# Allegro board iot_node.brd
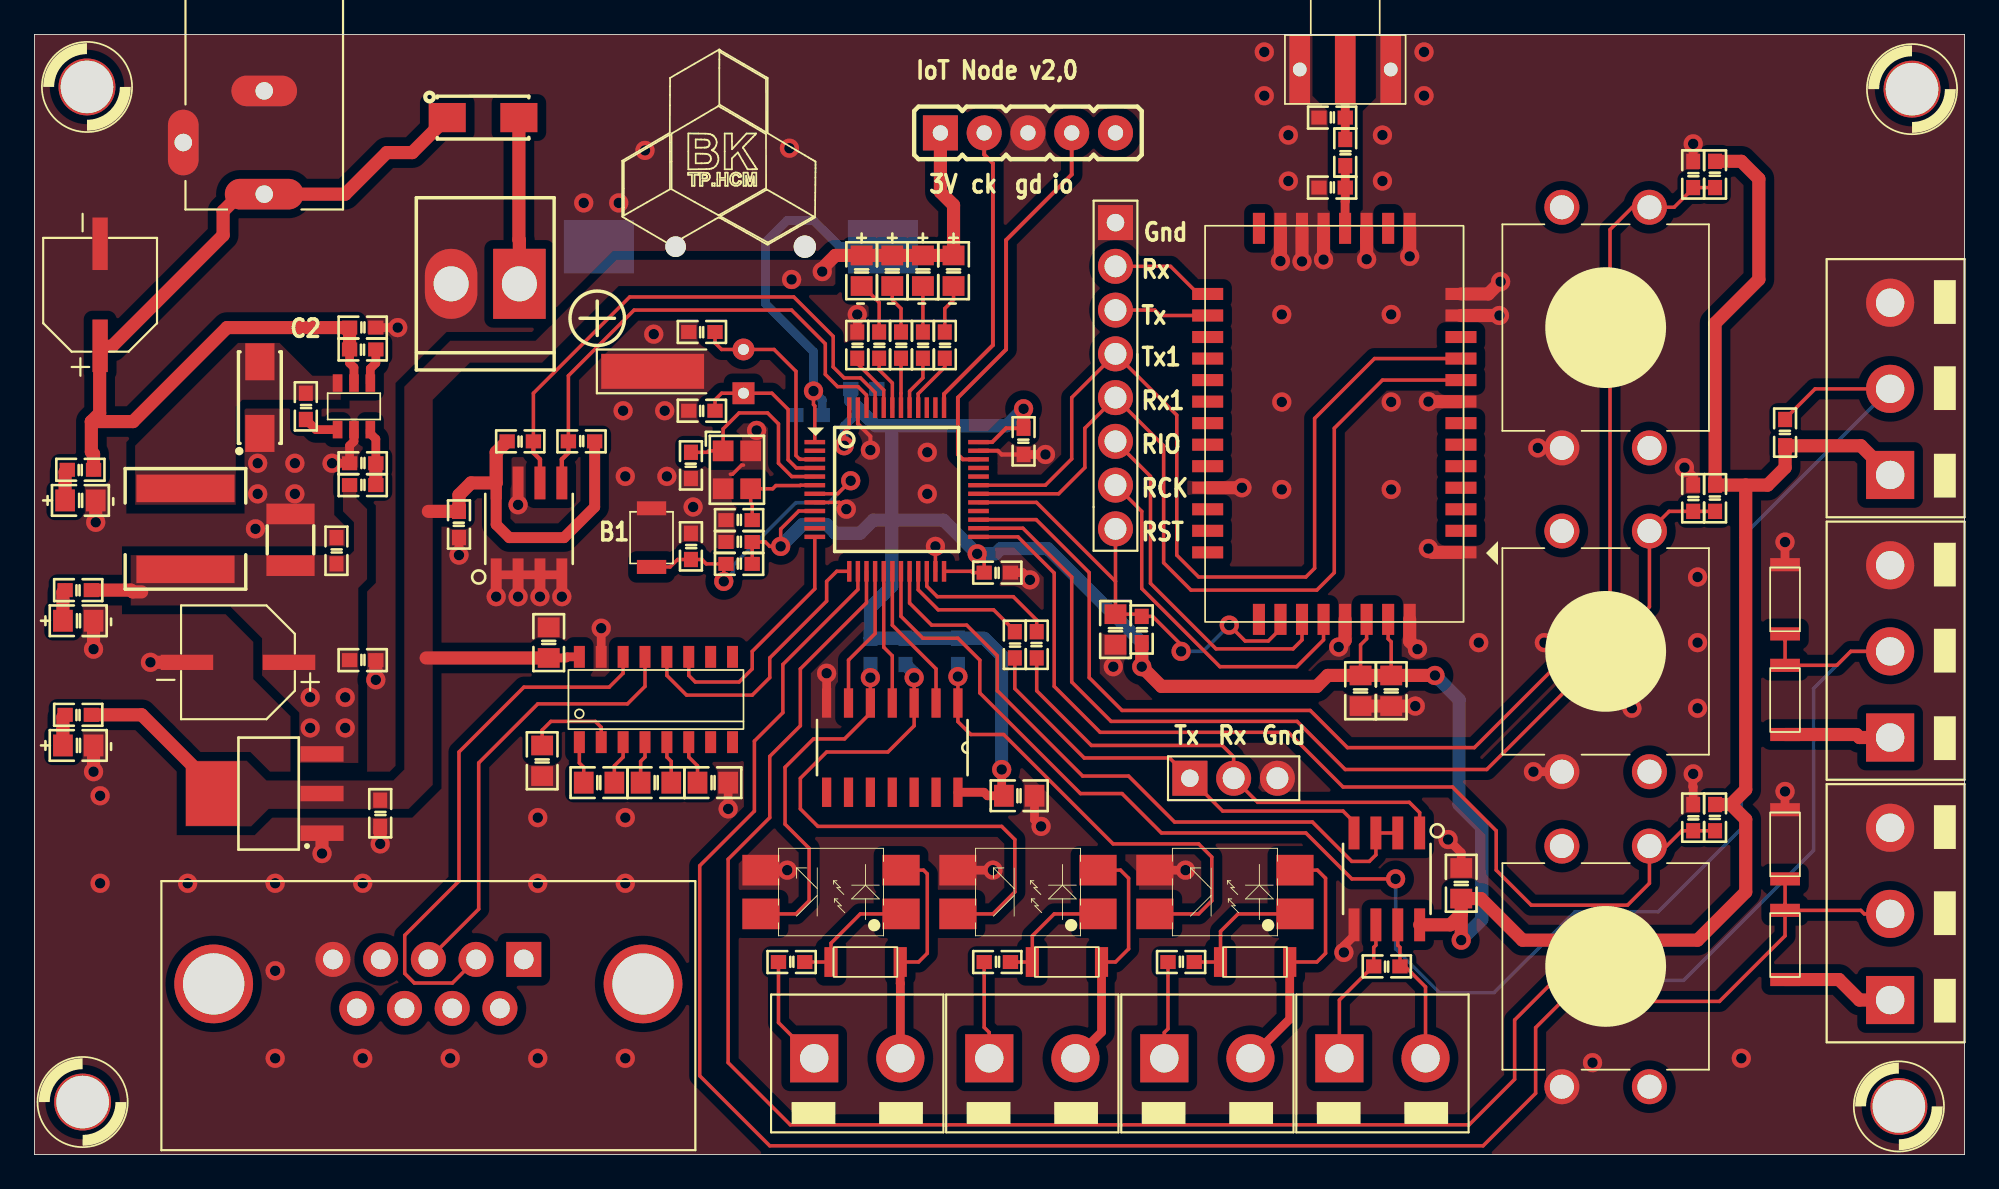
[diagram p0: board, top side]
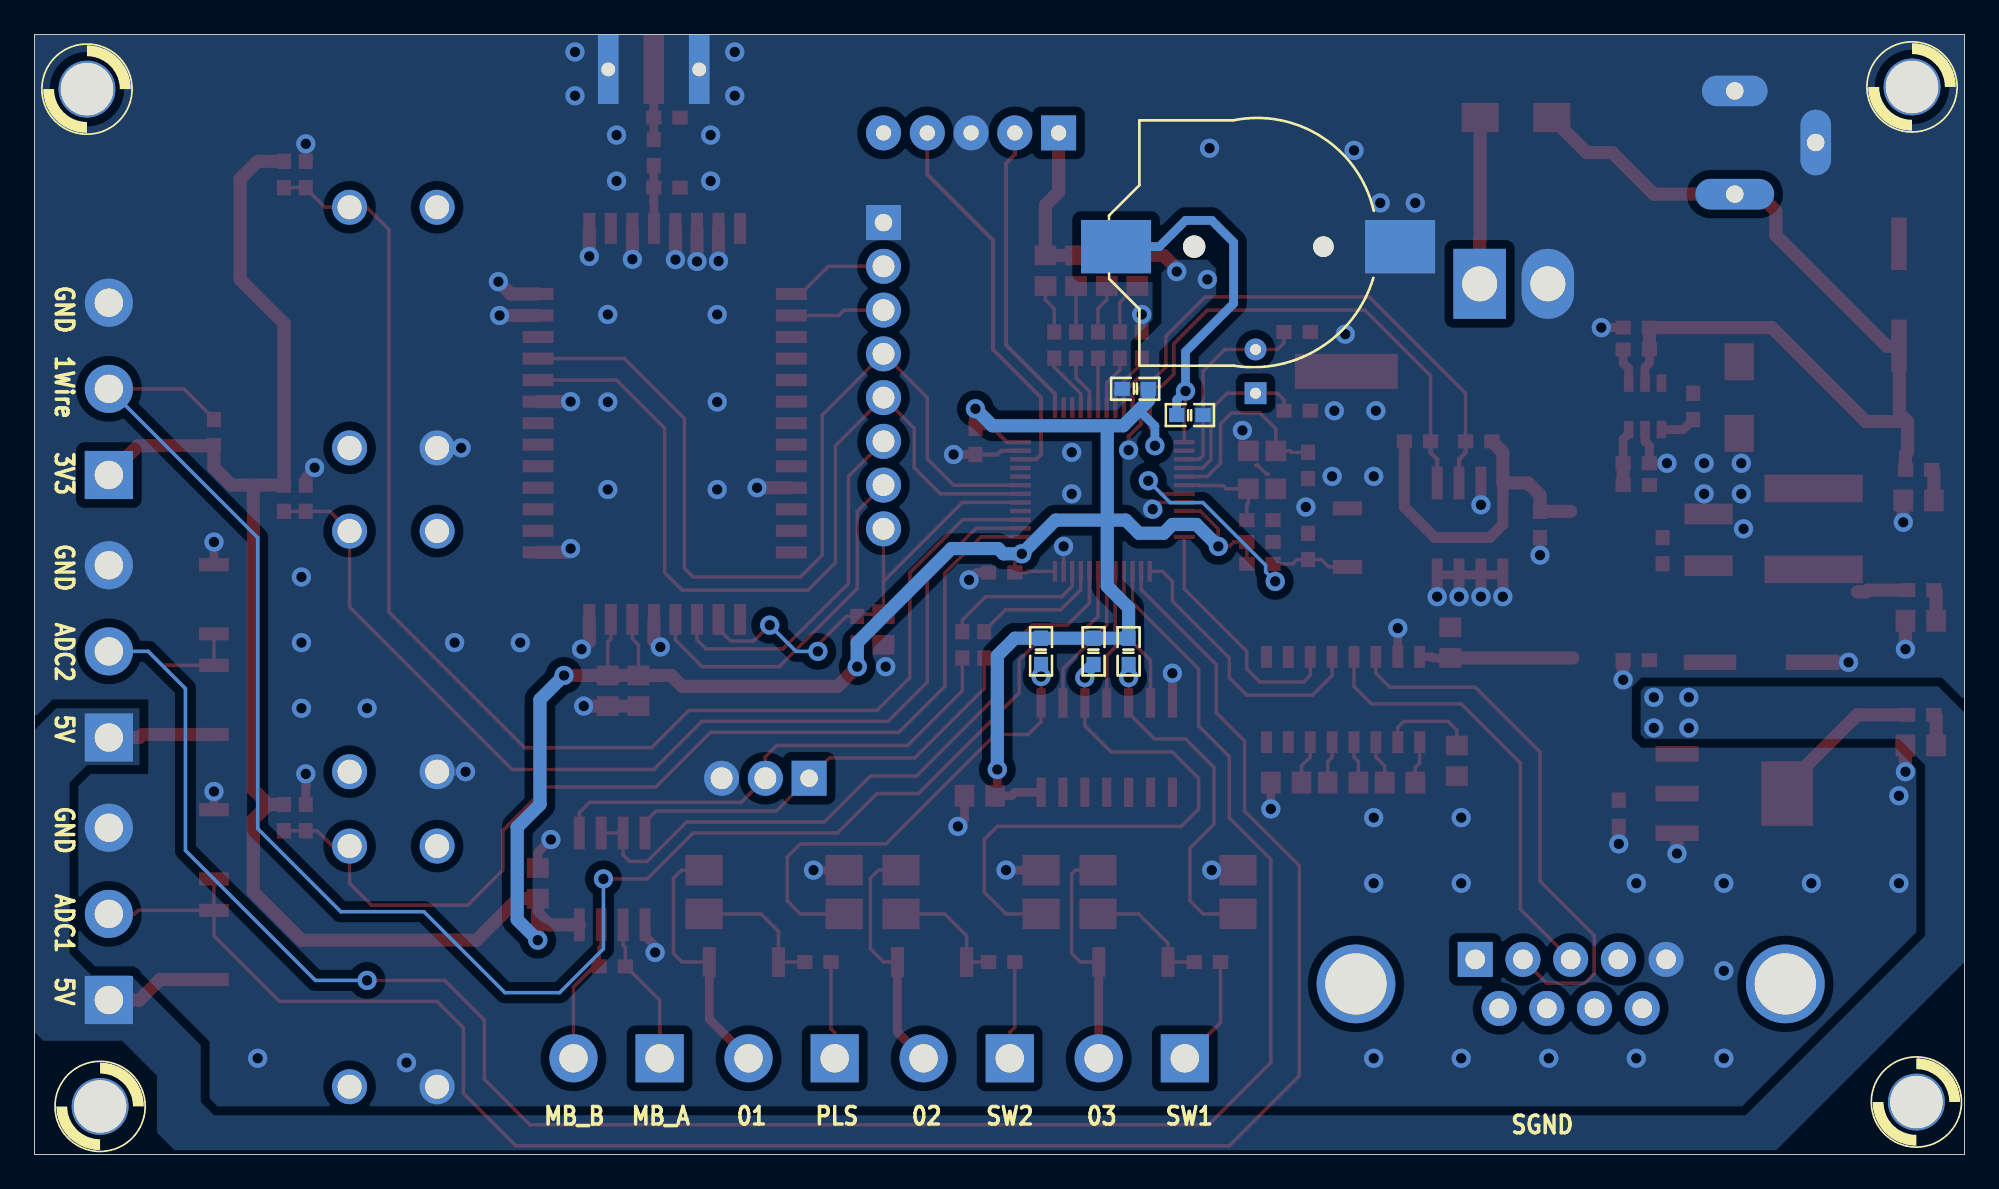
[diagram p1: board, bottom side, seen from below]

Outline 112.01 x 65.02 mm; copper layers: TOP, BOTTOM. Coordinates in mm from the lower left corner of the outline.
Outline path: 0,65.02 0,0 112.01,0 112.01,65.02 0,65.02

## Design rules (mm)
constraint set DEFAULT: min track width 0.203

## Placement (name value [footprint] x y rotation side)
B1  Reset  [B3U-1000P]  35.81 35.81 90 top
C1  10nF  [C0603]  19.05 48.01 180 top
C2  10nF  [C0603]  15.75 43.43 90 top
C3  100uF/35V  [CAP_AL_D]  3.81 49.91 90 top
C4  220u/16V  [CAP_AL_D]  11.81 28.57 180 top
C5  100nF  [C0603]  17.53 35.05 90 top
C6  22u/6.3V  [CAP_1210]  14.86 35.69 90 top
C7  100nF  [C0603]  19.05 28.7 180 top
C8  100nF  [C0603]  20.07 19.81 90 top
C9  0.1uF/6.3V  [C0603]  48.13 44.45 0 bottom
C10  0.1uF  [C0603]  40.89 35.56 180 top
C11  0.1uF/6.3V  [C0603]  44.96 42.93 180 bottom
C12  0.1uF/6.3V  [C0603]  55.88 33.78 0 top
C13  0.1uF/6.3V  [C0603]  57.4 41.4 270 top
C14  18pF  [C0603]  38.1 40 270 top
C15  18pF  [C0603]  40.89 36.83 180 top
C16  0.1uF/6.3V  [C0603]  96.27 19.56 90 top
C17  0.1uF/6.3V  [C0603]  96.27 38.1 90 top
C18  0.1uF/6.3V  [C0603]  38.1 35.31 90 top
C19  0.1uF/6.3V  [C0603]  96.27 56.9 90 top
C20  0.1uF  [C0805]  82.8 15.75 270 top
C22  0.1uF  [C0805]  57.15 20.83 180 top
C23  0.1uF  [C0805]  78.74 26.92 270 top
C24  0.1uF  [C0805]  76.96 26.92 270 top
C25  0.1uF  [C0805]  62.74 30.48 270 top
C26  0.1uF/6.3V  [C0603]  24.64 36.58 270 top
C34  100nF/25V  [C0805]  29.46 22.86 270 top
C35  100nF/25V  [C0805]  39.37 21.59 0 top
C40  10pF  [C0603]  75.31 56.13 180 top
C41  6pF  [C0603]  75.31 60.2 180 top
C148  100nF/25V  [C0805]  32.77 21.59 180 top
C149  100nF/25V  [C0805]  36.07 21.59 0 top
C150  100nF/25V  [C0805]  29.85 29.72 90 top
C151  18pF  [C0603]  38.73 47.75 0 top
C152  18pF  [C0603]  38.73 43.18 0 top
D1  1N4007  [DO214AC_SMA]  26.04 60.2 0 top
D2  1N5819  [DO214AC_SMA]  13.08 43.94 90 top
D3  LED  [LED0805]  2.67 37.97 0 top
D4  LED  [LED0805]  2.54 30.99 0 top
D5  LED  [LED0805]  2.54 23.75 0 top
D6  LED  [LED0805]  53.34 51.31 270 top
D7  LED  [LED0805]  51.56 51.31 270 top
D8  LED  [LED0805]  49.78 51.31 270 top
D9  LED  [LED0805]  48.01 51.31 270 top
D10  1N4007  [SOD80]  101.6 10.16 0 top
D11  1N4007  [SOD80]  101.6 16 0 top
D12  1N4007  [SOD80]  68.83 11.18 270 top
D13  1N4007  [SOD80]  101.6 24.38 0 top
D14  1N4007  [SOD80]  57.91 11.18 270 top
D15  1N4007  [SOD80]  101.6 30.23 0 top
D16  1N4007  [SOD80]  46.23 11.18 270 top
E1  ANTENNA_OPTION1  [SMA_EDGE]  76.07 62.99 90 top
J1  BAT  [HEADER2-PITCH3P96-B2P_VH]  26.16 50.55 180 top
J2  12VDC  [CONN_JACK_DC]  13.34 55.75 90 top
J3  JTAG/STSW  [HEADER_5]  52.58 59.31 0 top
J4  MCU_DBG  [HEADER3PITCH100MIL]  69.6 21.84 0 top
J6  RS485_SLAVE  [DOMINO2_5]  78.23 5.59 0 top
J7  ANALOG_IN1  [DOMINO3_5]  107.7 13.97 90 top
J8  SW_IN1  [DOMINO2_5]  68.07 5.59 0 top
J9  ANALOG_IN2  [DOMINO3_5]  107.7 29.21 90 top
J10  SW_IN2  [DOMINO2_5]  57.91 5.59 0 top
J11  ONEWIRE  [DOMINO3_5]  107.7 44.45 90 top
J12  PULSE_IN  [DOMINO2_5]  47.75 5.59 0 top
J16  DB9PORT  [DB9_FE]  22.86 9.91 180 top
J17  CON8  [HEADER8PITCH100MIL]  62.74 50.29 270 top
L1  8.8uH/1.7A  [IND_6X6MM]  8.76 36.32 270 top
L3  8.2nH  [C0603]  76.07 58.17 90 top
MH1  HOLE 4mm  [MH_3MM_1]  3.05 61.98 0 top
MH2  HOLE 4mm  [MH_3MM_1]  2.79 3.05 0 top
MH3  HOLE 4mm  [MH_3MM_1]  108.2 2.79 0 top
MH4  HOLE 4mm  [MH_3MM_1]  108.97 61.85 0 top
NOREF  -  []  33.78 52.45 0 top
R1  10K  [R0603]  19.05 46.74 0 top
R2  4k7  [R0603]  2.67 39.75 0 top
R3  4k7  [R0603]  2.54 32.77 0 top
R4  4k7  [R0603]  2.54 25.53 0 top
R5  49.9K  [R0603]  19.05 38.86 180 top
R6  10K  [R0603]  19.05 40.13 180 top
R7  4k7  [R0603]  47.75 46.99 90 top
R8  4k7  [R0603]  52.83 46.99 90 top
R9  4k7  [R0603]  51.56 46.99 90 top
R10  4k7  [R0603]  50.29 46.99 90 top
R11  4k7  [R0603]  49.02 46.99 90 top
R12  4.7K  [R0603]  40.89 34.29 180 top
R13  10K  [R0603]  97.54 19.56 270 top
R14  10K  [R0603]  97.54 38.1 270 top
R15  10K  [R0603]  97.54 56.9 270 top
R16  100R  [R0603]  78.49 10.92 0 top
R18  1K  [R0603]  66.55 11.18 180 top
R19  1K  [R0603]  55.88 11.18 180 top
R20  10K  [R0603]  101.6 41.91 270 top
R21  1K  [R0603]  43.94 11.18 180 top
R22  10K  [R0603]  64.26 30.48 90 top
R23  100R  [R0603]  53.59 29.21 270 bottom
R24  100R  [R0603]  50.55 29.21 270 bottom
R25  100R  [R0603]  48.51 29.21 270 bottom
R26  10K  [R0603]  31.75 41.4 180 top
R27  10K  [R0603]  28.19 41.4 0 top
R28  100R  [R0603]  58.17 29.59 270 top
R29  100R  [R0603]  56.9 29.59 90 top
SW1  DETECT SW  [TACT_SWITCH_12X12X7MM_SMD]  91.19 10.92 180 top
SW2  DETECT SW  [TACT_SWITCH_12X12X7MM_SMD]  91.19 29.21 180 top
SW3  DETECT SW  [TACT_SWITCH_12X12X7MM_SMD]  91.19 48.01 180 top
U1  AP3211  [SOT23-6]  18.54 43.43 90 top
U2  LM1117 5V  [SOT-223]  13.59 20.96 0 top
U3  STM32F103C8T6  [LQFP_48]  50.04 38.61 270 top
U5  MAX485  [SOIC-8]  78.49 16 180 top
U6  Opto  [OPTOSMD]  69.09 15.24 90 top
U7  74HC14  [SO_14]  49.78 23.62 270 top
U8  Opto  [OPTOSMD]  57.66 15.24 90 top
U9  Opto  [OPTOSMD]  46.23 15.24 90 top
U10  -  [RAK4600]  75.44 42.42 180 top
U11  AT24C02  [SOIC-8]  28.7 36.32 0 top
U12  MAX3232  [SOIC16]  36.07 26.42 90 top
U13  3V  [BAT_CR1220]  40.89 52.7 90 bottom
Y1  12M-18ppm  [CRY3225_M]  40.77 39.75 90 top
Y4  32.768KHz  [CRYRTC32768]  39.62 45.47 90 top

## Library data of the parts
B1 = SW PUSHBUTTON-SPST-2_0
C1 C2 C7 C8 C20 C22-C25 = CAP NP
C3 C4 = CAP
C5 = Cap 0603
C6 = CAP NP: User Part Number: PartNr
C9-C19 C26 C151 C152 = CAP NP_0
C34 C35 C148-C150 = CAP_USER
C40 = C-10pF/50V-SMD0805
C41 = C-6pF/50V-SMD0805
D1 D10-D16 = DIODE
D2 = SS34_2
D3-D9 = LED_0
E1 = ANTENNA_1
J1 J6 J8 J10 J12 = HEADER 2
J2 = CONN JACK PWR: User Part Number: X; Tolerance: X
J3 = HEADER 5
J4 J7 J9 J11 = HEADER 3
J16 = DB9PORT
J17 = CON8
L1 = INDUCTOR
L3 = L-8.2nH-SMD0805
MH1-MH4 = MOUNTING HOLE
R1 R5 R6 = RES-SM0402_0
R2-R4 R7-R11 R13-R16 R18-R29 = Resistor 0603
R12 = RESISTOR_0
SW1-SW3 = SW PUSHBUTTON-SPST-2
U1 = PMIC_SOT23-6
U2 = RT9193-33GB_1
U3 = STM32F103C8T6
U5 = MAX485_1
U6 U8 U9 = Opto
U7 = 74HC14
U10 = RAK4600
U11 = AT24C02_0
U12 = MAX3232_0: Tolerance: ***; User Part Number: ***
U13 = CR2302_1
Y1 = CRYSTAL-4_0
Y4 = XTAL-RTC

## Footprints (pads in the part's own frame, mm; a bottom-side part is the same pattern mirrored in y, then rotated)
B3U-1000P
  rect 0.813x1.702 smd: 1(-1.702,0) 2(1.702,0)
BAT_CR1220
  round 1.194 hole 1.194 unplated: (0,-3.685)
  round 1.295 hole 1.295 unplated: (0,3.815)
  rect 3.099x4.064 smd: 1(0,8.348) 2(0,-8.134)
C0603
  rect 0.889x0.813 smd: 1(-0.762,0) 2(0.762,0)
C0805
  rect 1.143x1.27 smd: 1(-0.889,0) 2(0.889,0)
CAP_1210
  rect 1.2x2.8 smd: 1(-1.5,0) 2(1.5,0)
CAP_AL_D
  rect 3.048x0.889 smd: 1(-2.962,0) 2(2.962,0)
CONN_JACK_DC
  oval 1.778x4.572 hole 1.016: 1(0,0)
  oval 1.778x3.81 hole 1.016: 2(5.994,0)
  oval 3.81x1.778 hole 1.016: 3(2.997,4.699)
CRY3225_M
  rect 1.2x1.2 smd: 1(1.1,0.8) 2(-1.101,0.8) 3(-1.101,-0.8) 4(1.1,-0.8)
CRYRTC32768
  rect 1.27x1.27 hole 0.635: 1(-1.27,-1.524)
  round 1.27 hole 0.635: 2(1.27,-1.524)
  rect 2.032x5.969 smd: 3(0,3.747)
DB9_FE
  round 4.572 hole 3.556: (-12.459,0) (12.459,0)
  rect 2.032x2.032 hole 1.143: 1(-5.537,-1.422)
  round 2.032 hole 1.143: 2(-2.769,-1.422) 3(0,-1.422) 4(2.769,-1.422) 5(5.537,-1.422) 6(-4.153,1.422) 7(-1.384,1.422) 8(1.384,1.422) 9(4.153,1.422)
DO214AC_SMA
  rect 2.15x1.696 smd: 1(-2.08,0) 2(2.08,0)
DOMINO2_5
  rect 2.794x2.794 hole 1.651: 1(-2.5,0)
  round 2.794 hole 1.651: 2(2.5,0)
DOMINO3_5
  rect 2.794x2.794 hole 1.651: 1(-5,0)
  round 2.794 hole 1.651: 2(0,0) 3(5,0)
HEADER2-PITCH3P96-B2P_VH
  rect 3.048x4.064 hole 2.032: 1(-1.98,0)
  oval 3.048x4.064 hole 2.032: 2(1.98,0)
HEADER3PITCH100MIL
  rect 2.032x2.032 hole 1.016: 1(-2.54,0)
  round 2.032 hole 1.27: 2(0,0) 3(2.54,0)
HEADER8PITCH100MIL
  rect 2.032x2.032 hole 1.016: 1(-3.81,0)
  round 2.032 hole 1.27: 2(-1.27,0) 3(1.27,0) 4(3.81,0) 5(6.35,0) 6(8.89,0) 7(11.43,0) 8(13.97,0)
HEADER_5
  rect 2.032x2.032 hole 0.889: 1(0,0)
  round 2.032 hole 0.889: 2(2.54,0) 3(5.08,0) 4(7.62,0) 5(10.16,0)
IND_6X6MM
  rect 1.6x5.7 smd: 1(-2.35,0) 2(2.35,0)
LED0805
  rect 1.143x1.27 smd: 1(-0.889,0) 2(0.889,0)
LQFP_48
  rect 0.254x1.2 smd: 1(-2.75,-4.75) 2(-2.25,-4.75) 3(-1.75,-4.75) 4(-1.25,-4.75) 5(-0.75,-4.75) 6(-0.25,-4.75) 7(0.25,-4.75) 8(0.75,-4.75) 9(1.25,-4.75) 10(1.75,-4.75) 11(2.25,-4.75) 12(2.75,-4.75) 25(2.75,4.75) 26(2.25,4.75) 27(1.75,4.75) 28(1.25,4.75) 29(0.75,4.75) 30(0.25,4.75) 31(-0.25,4.75) 32(-0.75,4.75) 33(-1.25,4.75) 34(-1.75,4.75) 35(-2.25,4.75) 36(-2.75,4.75)
  rect 1.2x0.254 smd: 13(4.75,-2.75) 14(4.75,-2.25) 15(4.75,-1.75) 16(4.75,-1.25) 17(4.75,-0.75) 18(4.75,-0.25) 19(4.75,0.25) 20(4.75,0.75) 21(4.75,1.25) 22(4.75,1.75) 23(4.75,2.25) 24(4.75,2.75) 37(-4.75,2.75) 38(-4.75,2.25) 39(-4.75,1.75) 40(-4.75,1.25) 41(-4.75,0.75) 42(-4.75,0.25) 43(-4.75,-0.25) 44(-4.75,-0.75) 45(-4.75,-1.25) 46(-4.75,-1.75) 47(-4.75,-2.25) 48(-4.75,-2.75)
MH_3MM_1
  round 3.302 hole 3.048: 1(0,0)
OPTOSMD
  rect 1.778x2.159 smd: 1(-1.27,-4.064) 2(1.27,-4.064) 3(1.27,4.064) 4(-1.27,4.064)
R0603
  rect 0.889x0.813 smd: 1(-0.762,0) 2(0.762,0)
RAK4600
  rect 1.8x0.7 smd: 1(-7.35,7.459) 2(-7.35,6.209) 3(-7.35,4.959) 4(-7.35,3.709) 5(-7.35,2.459) 6(-7.35,1.209) 7(-7.35,-0.041) 8(-7.35,-1.291) 9(-7.35,-2.541) 10(-7.35,-3.791) 11(-7.35,-5.041) 12(-7.35,-6.291) 13(-7.35,-7.541) 22(7.35,-7.541) 23(7.35,-6.291) 24(7.35,-5.041) 25(7.35,-3.791) 26(7.35,-2.541) 27(7.35,-1.291) 28(7.35,-0.041) 29(7.35,1.209) 30(7.35,2.459) 31(7.35,3.709) 32(7.35,4.959) 33(7.35,6.209) 34(7.35,7.459)
  rect 0.7x1.8 smd: 14(-4.375,-11.35) 15(-3.125,-11.35) 16(-1.875,-11.35) 17(-0.625,-11.35) 18(0.625,-11.35) 19(1.875,-11.35) 20(3.125,-11.35) 21(4.375,-11.35) 35(4.375,11.35) 36(3.125,11.35) 37(1.875,11.35) 38(0.625,11.35) 39(-0.625,11.35) 40(-1.875,11.35) 41(-3.125,11.35) 42(-4.375,11.35)
SMA_EDGE
  rect 4x1.2 hole 0.8: 1(0,2.64) 3(0,-2.64)
  rect 4x1.2 smd: 2(0,0)
SO_14
  rect 1.702x0.533 smd: 1(-2.591,3.81) 2(-2.591,2.54) 3(-2.591,1.27) 4(-2.591,0) 5(-2.591,-1.27) 6(-2.591,-2.54) 7(-2.591,-3.81) 8(2.591,-3.81) 9(2.591,-2.54) 10(2.591,-1.27) 11(2.591,0) 12(2.591,1.27) 13(2.591,2.54) 14(2.591,3.81)
SOD80
  rect 1.727x0.762 smd: 1(0,0) 2(-0.004,4.016)
SOIC16
  rect 1.27x0.635 smd: 1(-2.477,4.445) 2(-2.477,3.175) 3(-2.477,1.905) 4(-2.477,0.635) 5(-2.477,-0.635) 6(-2.477,-1.905) 7(-2.477,-3.175) 8(-2.477,-4.445) 9(2.477,-4.445) 10(2.477,-3.175) 11(2.477,-1.905) 12(2.477,-0.635) 13(2.477,0.635) 14(2.477,1.905) 15(2.477,3.175) 16(2.477,4.445)
SOIC-8
  rect 0.635x1.905 smd: 1(-1.905,-2.667) 2(-0.635,-2.667) 3(0.635,-2.667) 4(1.905,-2.667) 5(1.905,2.667) 6(0.635,2.667) 7(-0.635,2.667) 8(-1.905,2.667)
SOT23-6
  rect 1.016x0.559 smd: 1(-1.35,0.95) 2(-1.35,0) 3(-1.35,-0.95) 4(1.35,-0.95) 5(1.35,0) 6(1.35,0.95)
SOT-223
  rect 2.5x0.9 smd: 1(3.1,-2.3) 2(3.1,0) 3(3.1,2.3)
  rect 3x3.75 smd: 4(-3.3,0)
TACT_SWITCH_12X12X7MM_SMD
  round 2.032 hole 1.397: 1(-2.54,-6.985) 2(-2.54,6.985) 3(2.54,-6.985) 4(2.54,6.985)

## Nets
GND: B1.2 C1.1 C3.2 C4.2 C5.2 C6.2 C7.1 C8.1 C9.2 C10.2 C11.2 C12.2 C13.2 C14.2 C15.2 C16.2 C17.2 C18.2 C19.2 C20.1 C22.1 C23.2 C24.2 C25.2 C26.2 C34.2 C35.2 C40.2 C41.2 C150.2 C151.1 C152.1 D2.1 D3.2(CATHODE) D4.2(CATHODE) D5.2(CATHODE) D11.2 D15.2 E1.1 E1.3(GND_2) J1.2 J2.2 J2.3 J3.3 J4.3 J7.3 J9.3 J11.3 J16.5 J17.1 R6.2 R7.2 SW1.4 SW2.4 SW3.4 U1.2 U2.1 U3.8 U3.23 U3.35 U3.47(VSS__2) U5.5 U6.3 U7.7 U8.3 U9.3 U10.1 U10.8 U10.12 U10.13 U10.14 U10.16 U10.18 U10.19 U10.20 U10.31 U10.39 U10.42 U11.1 U11.2 U11.3 U11.4 U11.7(WP) U12.15 U13.2(-) Y1.2 Y1.4 Y4.3
VCC3.3V: C8.2 C9.1 C10.1 C12.1 C13.1 C20.2 C22.2 C23.1 C24.1 C26.1 C150.1 D6.1 D7.1 D8.1 D9.1 J3.1 J11.1 R4.2 R12.1 R13.1 R14.1 R15.1 R20.2 R22.1 R23.1 R24.1 R25.1 R26.1 R27.1 U2.2 U2.4 U3.9 U3.24 U3.36 U3.48 U5.8(VCC) U7.14(VCC) U10.40 U10.41 U11.8 U12.16(VCC)
VCC5V: C4.1 C5.1 C6.1 C7.2 D10.1(K) D13.1(K) J7.1 J9.1 L1.2 R3.2 R5.2 U2.3(VIN)
VIN: C1.2 C3.1 D1.1(K) J2.1 R1.1 R2.2 U1.5
GPIO_BTN_0: C16.1 R13.2 SW1.1 U3.25
GPIO_BTN_1: C17.1 R14.2 SW2.1 U3.26
GPIO_BTN_2: C19.1 R15.2 SW3.1 U3.27
GPIO_LED_0: R8.1 U3.40
GPIO_LED_1: R9.1 U3.41
GPIO_LED_2: R10.1 U3.42
GPIO_LED_3: R11.1 U3.43
I2C1_SCL: U10.5
I2C1_SCL_8130363: R27.2 U3.45 U11.6
I2C1_SDA: U10.4
I2C1_SDA_8130363: R26.2 U3.46 U11.5
JTCK-SWCLK: J3.2 U3.37
JTMS-SWDIO: J3.4 U3.34
LIGHT_SEN_ADC: U3.10
NFC1: U10.6
NFC2: U10.7
NRST: B1.1 C18.1 R12.2 U3.7
OPTO_PULSE: R25.2 U7.5 U9.4
OPTO_SW_1: R23.2 U6.4 U7.1
OPTO_SW_2: R24.2 U7.3 U8.4
P0.17: U10.24
PC14: C151.2 U3.3 Y4.2
PC15: C152.2 U3.4 Y4.1
PULSE_IN: U3.16 U7.6
RAK4600_RST: C25.1 J17.8 R22.2 U3.29 U10.36
RAK4600_RX: J17.5 U3.30 U10.9
RAK4600_TX: J17.4 U3.31 U10.10(USART2_TX)
RF_N: C40.1 L3.1 U10.17
RF_OUT: C41.1 E1.2 L3.2
RS485_A_SLAVE: J6.1 R16.1 U5.6
RS485_B_SLAVE: J6.2 R16.2 U5.7
RS485_DI_MASTER: U3.12 U12.11
RS485_DI_R: J4.1 R29.1 U5.4
RS485_DI_SLAVE: R29.2 U3.21
RS485_DO_R: J4.2 R28.2 U5.1
RS485_RDE_MASTER: U3.11
RS485_RDE_SLAVE: U3.20 U5.2 U5.3
RS485_RO_MASTER: U3.13 U12.12
RS485_RO_SLAVE: R28.1 U3.22
RX2: J16.3(TD) U12.13
SEN_ADC_1: D10.2 D11.1(K) J7.2 U3.14
SEN_ADC_2: D13.2 D15.1(K) J9.2 U3.15
SEN_ONEWIRE: J11.2 R20.1 U3.19
SW_IN_1: U3.18 U7.2
SW_IN_2: U3.17 U7.4
SWCLK: J17.7 U10.38
SWDIO: J17.6 U10.37
TX2: J16.2 U12.14
UART1_RX: J17.2 U10.22
UART1_TX: J17.3 U10.23
N8127918: D1.2 J1.1
N8128142: C2.1 U1.1
N8128146: C2.2 D2.2(CATHODE) L1.1 U1.6(SW)
N8128270: D3.1 R2.1
N8128274: D4.1 R3.1
N8128278: D5.1 R4.1
N8128370: R1.2 U1.4
N8128382: R5.1 R6.1 U1.3
N8130243: C11.1 U3.1 U13.1
N8130573: R7.1 U3.44
N8130891: U3.32
N8130973: C14.1 U3.5 Y1.1
N8131059: C15.1 U3.6 Y1.3(XOUT)
N8138791: J8.1 R18.2
N8138799: D12.1(K) R18.1 U6.1
N8138825: D12.2 J8.2 U6.2
N8139175: J10.1 R19.2
N8139183: D14.1(K) R19.1 U8.1
N8139275: D14.2 J10.2 U8.2
N8139443: J12.1 R21.2
N8139451: D16.1(K) R21.1 U9.1
N8139477: D16.2 J12.2 U9.2
N8145499: C148.1 U12.3
N8145507: C148.2 U12.1
N8145545: C149.1 U12.4
N8145573: C149.2 U12.5
N8145585: C34.1 U12.2
N8145597: C35.1 U12.6
N81312031: D6.2(CATHODE) R8.2
N81312191: D7.2(CATHODE) R9.2
N81312351: D8.2(CATHODE) R10.2
N81312511: D9.2(CATHODE) R11.2

Pads without a net: J3 5; J16 1 4 6 7 8 9; MH1 1; MH2 1; MH3 1; MH4 1; SW1 2 3; SW2 2 3; SW3 2 3; U3 2 28 33 38 39; U7 8 9 10 11 12 13; U10 2 3 11 15 21 25 26 27 28 29 30 32 33 34 35; U12 7 8 9 10

## Via types
v1: diameter 1.118, hole 0.61, TOP to BOTTOM, 130 vias

## Routing (per net, layer and track width the routed paths; a pad name or vN(x,y) marks a point on that pad's centre or on a via; arc(x,y) is an arc through that point)
GND: length 91
  TOP w0.203: 41.15,40.02 41.04,40.02 40.51,39.5 40.39,39.5 ; U3.23 v1(52.29,35.31) ; U3.8 46.7,37.86 46.71,37.85 46.74,37.85 v1(47.12,37.46)
  TOP w0.229: v1(48.51,40.89) 48.51,41.69 47.79,42.42 U3.47 ; U3.35 55.92,40.86 56.13,40.64
  TOP w0.254: 56.13,40.64 C13.2
  TOP w0.508: U1.2 18.54,41.4 18.29,41.15 R6.2 v1(17.27,40.13) ; C17.2 96.27,39.37 v1(95.76,39.88) ; C1.1 v1(21.08,48.01) ; U9.3 v1(43.69,16.51) ; C26.2 v1(24.64,34.8) ; C12.2 57.35,33.78 v1(57.77,33.36) ; 29.34,33.65 v1(29.34,32.38) ; 29.34,33.65 U11.2 ; 29.34,33.65 U11.4 v1(30.61,32.38) ; U11.2 v1(28.07,32.38) ; U11.2 U11.1 v1(26.8,32.38) ; U8.3 v1(55.63,16.51) ; C16.2 96.27,21.34 96.24,21.36 96.24,22.08 v1(96.27,22.1) ; SW2.4 v1(87,22.23) ; C19.2 v1(96.27,58.67) ; C20.1 82.8,17.53 v1(82.04,18.29) ; C13.2 v1(58.67,40.64) ; SW3.4 v1(87.25,41.02) ; v1(75.99,11.73) 75.99,12.11 76.58,12.7 U5.5 ; D11.2 v1(101.6,21.08) ; U11.7 v1(28.07,37.72) ; R7.2 v1(47.75,48.77) ; C35.2 v1(40.26,20.07) ; C22.1 58.04,19.43 v1(58.42,19.05) ; U12.15 v1(32.89,30.56) ; U6.3 v1(66.8,16.51) ; U7.7 v1(45.97,27.94) ; D15.2 v1(101.6,35.56)
  TOP w0.762: U10.42 79.81,29.79 v1(80.26,29.34) ; v1(75.69,29.46) 76.06,29.84 U10.39 ; C24.2 C23.2 v1(80.14,26.04) ; U10.16 v1(77.31,51.97) ; U10.14 v1(79.81,52.14) ; C8.1 v1(20.07,18.03) ; U10.18 v1(74.81,51.95) ; 3.43,23.75 v1(3.43,22.23) ; v1(80.9,35.18) 81.12,34.96 U10.1 ; C7.1 v1(19.81,27.56) ; v1(85.09,50.67) 84.38,49.96 U10.13 ; U10.12 v1(85.02,48.71) ; U10.8 v1(80.9,43.71) ; D3.2 v1(3.56,36.7) ; 3.43,30.99 v1(3.43,29.34) ; U10.19 v1(73.56,51.85) ; C4.2 v1(6.73,28.57) ; U10.31 v1(70.08,38.71) ; U10.20 v1(72.31,51.87) ; U2.1 v1(16.69,17.47)
  vias: v1(3.81,20.83) v1(3.81,15.75) v1(8.89,15.75) v1(12.83,36.32) v1(12.95,40.13) v1(12.95,38.35) v1(13.97,15.75) v1(13.97,10.67) v1(13.97,5.59) v1(15.11,40.13) v1(15.11,38.35) v1(19.05,15.75) v1(19.05,5.59) v1(24.13,5.59) v1(29.21,19.56) v1(29.21,15.75) v1(29.21,5.59) v1(31.88,55.24) v1(33.91,55.24) v1(34.16,43.18) v1(34.29,39.37) v1(34.29,19.56) v1(34.29,15.75) v1(34.29,5.59) v1(35.43,58.29) v1(35.94,47.62) v1(36.58,43.18) v1(36.7,39.37) v1(38.23,37.59) v1(41.91,42.04) v1(43.81,58.42) v1(51.82,40.77) v1(51.82,38.35) v1(62.61,28.32) v1(71.37,64.01) v1(71.37,61.47) v1(72.39,48.77) v1(72.39,43.69) v1(72.39,38.61) v1(72.77,59.18) v1(72.77,56.52) v1(78.23,59.18) v1(78.23,56.52) v1(78.74,48.77) v1(78.74,43.69) v1(78.74,38.61) v1(80.65,64.01) v1(80.65,61.47) v1(83.82,29.72) v1(87.63,29.72) v1(90.42,5.33) v1(92.71,25.91) v1(96.52,33.53) v1(96.52,29.72) v1(96.52,25.91) v1(99.06,5.59)
VCC3.3V: length 269.9
  TOP w0.203: R12.1 C10.1 42.42,35.56 42.67,35.31 v1(43.31,35.31) 43.31,36.31 44.36,37.36 U3.9 ; C24.1 76.96,29.59 77.31,29.94 U10.40 ; U10.41 78.56,29.94 78.74,29.76 C23.1 ; v1(54.71,34.87) 54.91,34.87 55.12,34.67 C12.1 54.44,33.78 54.37,33.86 U3.24 ; U3.48 47.29,42.21 47.26,42.18 47.23,42.18 46.99,41.94 v1(46.99,41.15)
  TOP w0.229: C13.1 56.39,42.16 55.58,41.36 U3.36
  TOP w0.508: U12.16 30.92,28.89 30.86,28.83 C150.1 ; U7.14 55.11,21.03 55.31,20.83 C22.2 56.13,20.96 v1(56.13,22.35)
  TOP w0.635: R26.1 32.51,37.59 30.73,35.81 27.56,35.81 26.8,36.58 U11.8
  TOP w0.762: v1(45.72,51.26) 45.72,51.43 46.48,52.2 53.34,52.2 53.34,55.12 52.58,55.88 J3.1 ; U5.8 82.17,13.34 82.8,13.97 ; 98.45,20.32 99.31,21.18 99.31,38.86 ; 98.45,20.32 R13.1 ; 98.45,20.32 99.31,19.46 99.31,15.24 96.52,12.45 86.36,12.45 83.95,14.86 C20.2 82.8,13.97 ; R15.1 99.06,57.66 100.08,56.64 100.08,50.8 97.54,48.26 R14.1 99.31,38.86 ; 82.8,13.97 v1(82.8,12.45) ; 99.31,38.86 100.58,38.86 101.6,39.88 R20.2 106,41.15 J11.1 ; C150.1 22.73,28.83 ; U2.4 10.29,21.46 6.22,25.53 R4.2 ; C13.1 v1(57.4,43.29) ; 22.86,37.34 C26.1 24.64,38.29 25.34,38.99 U11.8 26.8,40.77 R27.1 ; v1(81.28,27.81) C23.1 C24.1 75.06,27.81 74.42,27.18 65.41,27.18 v1(64.26,28.32) R22.1
  BOTTOM w0.508: v1(46.99,41.15) 46.99,42.29 47.92,43.22
  BOTTOM w0.762: v1(64.26,28.32) R22.1 58.8,35.18 56.08,35.18 55.78,34.87 v1(54.71,34.87) 52.76,36.83 49.75,36.83 ; v1(43.31,35.31) 44.58,36.58 45.97,36.58 46.48,36.07 47.92,36.07 48.68,36.83 49.75,36.83 ; v1(57.4,43.29) 56.42,42.31 49.75,42.31 ; 49.75,36.83 49.75,42.31 ; 49.75,36.83 49.75,32.99 48.51,31.75 R25.1 R24.1 R23.1 55.12,29.97 56.13,28.96 v1(56.13,22.35) ; 49.75,42.31 48.83,42.31 47.37,43.76 C9.1 ; v1(81.28,27.81) 82.68,26.42 82.68,20.32 84,19 84,13.64 v1(82.8,12.45)
  vias: v1(43.94,50.8)
VCC5V: length 15.7
  TOP w0.762: 6.22,32.66 5.7,32.66 5.6,32.77 R3.2 ; J7.1 105.92,8.97 104.73,10.16 D10.1 ; J9.1 105.92,24.21 105.74,24.38 D13.1
  vias: v1(16,26.54) v1(16,24.77) v1(18.03,26.54) v1(18.03,24.77)
VIN: length 54.5
  TOP w0.508: U1.5 18.54,45.69 18.29,45.95 R1.1
  TOP w0.762: 3.3,42.55 3.3,40.79 3.43,40.67 R2.2 ; 3.3,42.55 5.72,42.55 11.18,48.01 C1.2 R1.1 ; 3.3,42.55 3.78,43.03 3.78,46.92 ; C3.1 3.78,46.92 ; 3.78,46.92 4.5,46.92 10.95,53.37 10.95,54.76 11.94,55.75 J2.1 18.03,55.75 20.45,58.17 21.92,58.17 D1.1
GPIO_BTN_0: length 59.9
  TOP w0.203: R13.2 C16.1 95.61,18.8 94.72,17.91 SW1.1 93.73,15.75 92.46,14.48 86.87,14.48 84.84,16.51 84.84,18.8 82.3,21.34 75.95,21.34 72.77,24.51 61.85,24.51 59.18,27.18 59.18,33.76 57.08,35.86 U3.25
GPIO_BTN_1: length 60.9
  TOP w0.203: R14.2 C17.1 94.87,37.34 SW2.1 93.73,31.79 84.28,22.35 76.07,22.35 73.28,25.15 62.48,25.15 60.2,27.43 60.2,33.53 57.37,36.36 U3.26
GPIO_BTN_2: length 78.3
  TOP w0.203: R15.2 C19.1 96.27,56.1 95.16,54.99 SW3.1 92.74,54.99 91.44,53.7 91.44,31.5 83.57,23.62 76.2,23.62 74.04,25.78 63.12,25.78 61.21,27.69 61.21,33.78 58.14,36.86 U3.27
GPIO_LED_0: length 3.5
  TOP w0.203: U3.40 51.29,44.17 52.83,45.71 R8.1
GPIO_LED_1: length 3.2
  TOP w0.203: U3.41 50.79,44.31 51.56,45.09 R9.1
GPIO_LED_2: length 2.9
  TOP w0.203: U3.42 50.29,44.19 50.29,44.19 R10.1
GPIO_LED_3: length 3.2
  TOP w0.203: U3.43 49.79,44.79 49.02,45.55 R11.1
I2C1_SCL_8130363: length 31.7
  TOP w0.203: R27.2 28.96,44.2 34.54,49.78 44.07,49.78 46.35,47.5 46.35,45.72 46.99,45.09 47.94,45.09 48.79,44.23 U3.45
  TOP w0.254: 29.34,38.99 29.34,40.36 28.96,40.74 R27.2
I2C1_SDA_8130363: length 29.1
  TOP w0.203: R26.2 30.99,45.21 34.8,49.02 43.94,49.02 45.9,47.07 45.9,45.29 46.61,44.58 47.8,44.58 48.29,44.09 U3.46
  TOP w0.254: R26.2 30.99,40.74 30.61,40.36 U11.5
JTCK-SWCLK: length 17.3
  TOP w0.229: U3.37 52.79,44.15 55.63,46.99 55.63,57.54 55.12,58.05 J3.2
JTMS-SWDIO: length 22.7
  TOP w0.229: J3.4 60.2,56.9 56.39,53.09 56.39,46.74 53.59,43.94 53.59,40.64 53.88,40.36 U3.34
NRST: length 18.1
  TOP w0.203: B1.1 36.89,34.11 37.33,34.54 C18.1 38.73,34.54 38.99,34.29 R12.2 40,34.16 v1(40,33.27) ; U3.7 46.61,38.36 v1(47.37,39.12)
  BOTTOM w0.203: v1(40,33.27) 40.56,33.83 40.56,34.21 44.2,37.85 46.1,37.85 v1(47.37,39.12)
OPTO_PULSE: length 20.5
  TOP w0.203: U9.4 44.2,13.97 44.96,14.73 44.96,17.78 43.56,19.18 43.56,22.48 45.21,24.13 47.02,24.13 48.51,25.63 U7.5 v1(48.51,27.69)
  BOTTOM w0.762: v1(48.51,27.69) R25.2
OPTO_SW_1: length 27.5
  TOP w0.203: U6.4 67.56,13.97 68.33,14.73 68.33,17.27 67.56,18.03 62.6,18.03 56.25,24.38 54.34,24.38 53.59,25.13 U7.1 v1(53.59,27.75)
  BOTTOM w0.762: v1(53.59,27.75) R23.2
OPTO_SW_2: length 33.5
  TOP w0.203: v1(51.05,27.69) U7.3 51.05,24.89 49.53,23.37 45.97,23.37 44.45,21.84 44.45,20.07 45.47,19.05 56.13,19.05 56.9,18.29 56.9,15.24 55.63,13.97 U8.4
  BOTTOM w0.762: v1(51.05,27.69) 51.05,27.94 R24.2
PC14: length 12.1
  TOP w0.203: C151.2 39.5,47.12 39.88,46.74 Y4.2 42.93,46.74 44.2,45.47 44.2,40.58 44.4,40.38 44.44,40.38 44.46,40.36 U3.3
PC15: length 10.1
  TOP w0.203: U3.4 44.22,39.86 43.74,40.34 43.74,43.26 42.8,44.2 Y4.1 39.88,44.2 39.5,43.81 C152.2
PULSE_IN: length 8.3
  TOP w0.203: U3.16 48.79,30.25 47.24,28.7 U7.6
RAK4600_RST: length 27.3
  TOP w0.203: 62.74,33.27 58.15,37.86 U3.29 ; 62.74,33.27 C25.1 64.14,31.37 R22.2 64.9,31.24 66.55,29.59 v1(66.55,29.21) ; 62.74,33.27 J17.8 ; U10.36 72.31,30.52 71.61,29.81 70.26,29.81 v1(69.34,30.73)
  BOTTOM w0.203: v1(66.55,29.21) 67.82,29.21 v1(69.34,30.73)
RAK4600_RX: length 50.2
  TOP w0.203: U3.30 59.44,38.36 60.96,39.88 60.96,42.16 J17.5 65.53,41.15 65.53,34.35 67.12,32.77 74.42,32.77 75.44,33.78 75.44,42.16 78.23,44.96 U10.9
RAK4600_TX: length 53.7
  TOP w0.203: U10.10 77.77,46.21 74.3,42.73 74.3,34.04 73.79,33.53 67.56,33.53 66.29,34.8 66.29,42.93 J17.4 60.2,43.94 60.2,40.39 58.67,38.86 U3.31
RF_N: length 3.6
  TOP w0.508: L3.1 C40.1 76.07,55.35 76.06,55.34 U10.17
RF_OUT: length 4.1
  TOP w0.508: E1.2 C41.1 L3.2
RS485_A_SLAVE: length 8.6
  TOP w0.203: U5.6 77.85,12.15 77.72,12.03 R16.1 77.69,10.92 75.73,8.97 J6.1
RS485_B_SLAVE: length 8.6
  TOP w0.203: J6.2 80.73,9.73 79.54,10.92 R16.2 79.25,12.03 79.12,12.15 U5.7
RS485_DI_MASTER: length 14.4
  TOP w0.203: U3.12 45.29,32.84 41.66,29.21 41.66,28.19 40.89,27.43 38.35,27.43 37.97,27.81 U12.11
RS485_DI_R: length 25.3
  TOP w0.203: R29.1 56.9,27.05 60.93,23.02 65.88,23.02 J4.1 68.96,19.94 75.95,19.94 76.58,19.3 U5.4
RS485_DI_SLAVE: length 7.7
  TOP w0.203: R29.2 56.9,30.39 55.66,31.62 52.45,31.62 51.29,32.79 U3.21
RS485_DO_R: length 29
  TOP w0.203: R28.2 58.17,26.92 61.34,23.75 68.94,23.75 69.6,23.09 J4.2 70.99,20.45 79.79,20.45 80.39,19.85 U5.1
RS485_RDE_SLAVE: length 39
  TOP w0.203: U3.20 50.79,32.02 52.07,30.73 54.1,30.73 55.88,28.96 55.88,26.92 60.83,21.97 63.5,21.97 66.17,19.3 74.17,19.3 76.45,17.02 77.47,17.02 77.85,17.4 U5.3 U5.2
RS485_RO_MASTER: length 16.5
  TOP w0.203: U3.13 46.56,33.86 45.97,33.27 45.97,32.13 42.67,28.83 42.67,27.69 41.66,26.67 37.85,26.67 36.7,27.81 U12.12
RS485_RO_SLAVE: length 8.7
  TOP w0.203: R28.1 58.17,31.03 56.81,32.38 52.4,32.38 51.79,32.99 U3.22
RX2: length 25.8
  TOP w0.203: U12.13 35.43,27.18 34.42,26.16 29.21,26.16 25.78,22.73 25.78,14.25 J16.3
SEN_ADC_1: length 114.5
  TOP w0.203: D10.2 101.6,12.7 97.79,8.89 88.65,8.89 87.12,7.37 87.12,3.56 84.07,0.51 42.67,0.51 38.61,4.57 38.61,16.76 41.78,19.94 41.78,24 43.43,25.65 43.43,28.45 47.79,32.8 U3.14 ; D10.2 101.6,14.56 101.6,14.56 D11.1 ; D10.2 105.99,14.18 106.2,13.97 J7.2
SEN_ADC_2: length 127.9
  TOP w0.203: v1(92.71,10.11) 88.2,10.11 85.9,7.81 85.9,4.37 83.26,1.73 43.87,1.73 40.26,5.33 40.26,17.14 42.67,19.56 42.67,23.11 44.45,24.89 44.45,28.19 48.29,32.03 U3.15 ; 101.6,28.4 104.6,28.4 105.41,29.21 J9.2 ; 101.6,28.4 101.6,29.84 101.6,29.85 D15.1 ; 101.6,28.4 D13.2
  BOTTOM w0.203: J9.2 105.41,29.21 103.25,27.05 103.25,17.65 95.71,10.11 v1(92.71,10.11)
SEN_ONEWIRE: length 103.8
  TOP w0.203: J11.2 103.34,44.45 101.6,42.71 R20.1 ; v1(78.99,16) 76.45,16 73.79,18.67 65.41,18.67 63.12,20.96 60.71,20.96 54.86,26.8 54.86,28.7 53.59,29.97 51.56,29.97 50.29,31.25 U3.19
  BOTTOM w0.203: v1(78.99,16) 78.99,11.94 81.53,9.4 84.71,9.4 89.41,14.1 94.23,14.1 99.06,18.92 99.06,35.81 J11.2
SW_IN_1: length 8.7
  TOP w0.203: U7.2 52.32,28.19 49.79,30.73 U3.18
SW_IN_2: length 7.9
  TOP w0.203: U3.17 49.29,29.45 49.78,28.96 U7.4
SWCLK: length 20.9
  TOP w0.203: J17.7 64.26,37.34 64.26,32.86 68.8,28.32 73.26,28.32 74.81,29.88 U10.38
SWDIO: length 20.9
  TOP w0.203: J17.6 64.77,39.37 64.77,33.16 68.57,29.36 73.04,29.36 73.56,29.87 U10.37
TX2: length 31.5
  TOP w0.203: J16.2 24.26,9.96 22.05,9.96 21.49,10.52 21.49,12.73 24.64,15.88 24.64,23.37 28.4,27.13 33.35,27.13 34.16,27.94 U12.14
UART1_RX: length 6
  TOP w0.203: J17.2 65.93,51.56 67.54,49.96 U10.22
UART1_TX: length 5.5
  TOP w0.203: J17.3 65.02,49.02 65.34,48.71 U10.23
N8127918: length 9.7
  TOP w0.762: J1.1 28.14,53.09 28.12,53.11 D1.2
N8128142: length 2.1
  TOP w0.508: U1.1 16.34,42.08 C2.1
N8128270: length 1.8
  TOP w0.762: R2.1 1.78,39.62 D3.1
N8128274: length 1.8
  TOP w0.762: D4.1 1.65,32.64 R3.1
N8128278: length 1.8
  TOP w0.762: R4.1 1.65,25.4 D5.1
N8128370: length 2.1
  TOP w0.508: R1.2 19.81,45.95 19.49,45.63 U1.4
N8128382: length 3.4
  TOP w0.508: U1.3 19.49,41.86 19.81,41.54 R6.1
  TOP w0.762: R5.1 R6.1
N8130243: length 22.4
  TOP w0.203: U3.1 45.29,43.46 45.21,43.54 v1(45.21,44.32)
  BOTTOM w0.508: U13.1 46.73,52.7 45.21,54.23 43.69,54.23 42.42,52.96 42.42,49.4 45.21,46.61 v1(45.21,44.32) 45.72,43.81 C11.1
N8130573: length 3.5
  TOP w0.203: U3.44 49.29,44.38 47.75,45.92 R7.1
N8130973: length 11.8
  TOP w0.203: U3.5 43.95,39.36 43.18,40.13 43.18,42.42 42.54,43.05 40.89,43.05 39.97,42.13 Y1.1 39.14,40.85 39.05,40.77 C14.1
N8131059: length 5.7
  TOP w0.203: C15.1 41.66,37.73 41.57,37.82 Y1.3 42.85,38.65 43.03,38.84 44.44,38.84 44.46,38.86 U3.6
N8138791: length 5.7
  TOP w0.203: R18.2 65.79,7.3 65.57,7.09 J8.1
N8138799: length 8
  TOP w0.203: U6.1 69.85,13.97 68.83,12.95 D12.1 R18.1
N8138825: length 15.2
  TOP w0.203: U6.2 74.46,16.51 74.93,16.04 74.93,11.68 74.43,11.18 D12.2
  TOP w0.508: J8.2 72.85,7.87 D12.2
N8139175: length 5.7
  TOP w0.203: R19.2 55.12,7.38 55.41,7.09 J10.1
N8139183: length 7.1
  TOP w0.203: U8.1 59.18,13.97 57.91,12.7 D14.1 R19.1
N8139275: length 14.2
  TOP w0.203: D14.2 62.74,11.18 63.5,11.94 63.5,16.04 63.03,16.51 U8.2
  TOP w0.508: D14.2 61.93,7.1 J10.2
N8139443: length 6.4
  TOP w0.203: J12.1 43.18,7.66 R21.2
N8139451: length 7.4
  TOP w0.203: U9.1 47.93,13.97 46.23,12.27 D16.1 R21.1
N8139477: length 13.6
  TOP w0.203: U9.2 51.6,16.51 51.82,16.29 51.82,11.68 51.31,11.18 D16.2
  TOP w0.508: J12.2 50.25,9.93 50.24,9.94 D16.2
N8145499: length 2.6
  TOP w0.203: U12.3 34.16,23.08 33.65,22.57 C148.1
N8145507: length 2.5
  TOP w0.203: U12.1 31.62,22.73 31.88,22.48 C148.2
N8145545: length 2.5
  TOP w0.203: U12.4 35.43,23.08 35.18,22.82 C149.1
N8145573: length 2.5
  TOP w0.203: U12.5 36.7,23.08 36.96,22.82 C149.2
N8145585: length 5.5
  TOP w0.203: U12.2 32.89,24.8 32.55,25.15 29.97,25.15 29.46,24.64 C34.1
N8145597: length 2.6
  TOP w0.203: U12.6 37.97,23.08 38.48,22.57 C35.1
N81312031: length 2.9
  TOP w0.203: R8.2 52.83,49.11 53.34,49.62 D6.2
N81312191: length 2.7
  TOP w0.203: R9.2 D7.2
N81312351: length 2.9
  TOP w0.203: D8.2 49.78,49.62 50.29,49.11 R10.2
N81312511: length 3.1
  TOP w0.203: R11.2 49.02,49.47 48.07,50.42 D9.2

## Copper pours and planes (outline as drawn; the poured copper is in the pictures)
GND on TOP: 0,65.02 74.17,65.02 74.17,61.47 75.06,60.58 75.06,54.86 75.18,54.74 75.18,52.58 75.44,52.32 76.71,52.32 76.96,52.58 76.96,54.74 77.09,54.86 77.09,60.58 77.85,61.34 77.85,65.02 112.01,65.02 112.01,0 0,0 ; 32 cut-outs
GND on BOTTOM: 0,65.02 112.01,65.02 112.01,0 0,0 ; 3 cut-outs
VCC3.3V on TOP: 8.76,19.05 12.57,19.05 13.59,20.07 21.72,20.07 23.11,21.46 23.11,43.81 25.27,45.97 29.46,45.97 33.91,50.42 46.35,50.42 46.48,50.55 46.48,51.94 33.78,51.94 29.08,47.24 24.13,47.24 21.46,44.58 21.46,22.35 20.83,21.72 13.46,21.72 12.32,22.86 8.89,22.86 8.76,22.73
VCC3.3V on BOTTOM: 43.43,49.91 43.43,51.43 43.94,51.94 45.85,51.94 46.61,51.18 46.61,48.26 47.88,46.99 47.88,43.94 47.62,43.69 46.99,43.69 46.74,43.94 46.74,46.61
VCC5V on TOP: 5.59,34.8 18.29,34.8 18.54,35.05 18.54,36.7 17.91,37.34 17.91,39.37 18.67,39.37 18.67,38.1 19.3,37.46 19.3,33.4 18.8,32.89 18.8,22.73 15.37,22.73 15.37,25.65 13.21,27.81 13.21,29.97 11.3,31.88 5.59,31.88
VCC5V on BOTTOM: 3.81,24.13 2.29,22.61 2.29,12.7 12.7,2.29 101.6,2.29 102.36,3.05 102.36,6.35 106.43,10.41 108.71,10.41 109.98,11.68 109.98,21.59 108.97,22.61 105.92,22.61 105.92,25.91 110.74,25.91 112.01,24.64 112.01,7.11 111.51,6.6 106.93,6.6 104.9,4.57 104.9,1.27 103.89,0.25 10.92,0.25 0,11.18 0,25.65 1.52,27.18 18.54,27.18 18.8,26.92 18.8,24.38 18.54,24.13
N8128146 on TOP: 17.78,45.21 16.13,45.21 14.22,47.12 11.81,47.12 5.84,41.15 5.84,37.72 11.68,37.72 11.68,43.43 12.07,43.81 17.78,43.81

## Text on the board
Ref Des/Silkscreen Bottom: SGND | SW1 | 03 | SW2 | 02 | PLS | 01 | MB_A | MB_B | GND | 1Wire | 3V3 | ADC2 | 5V | ADC1
Ref Des/Silkscreen Top: IoT Node v2,0 | 3V | ck | gd | io | Rx | Tx | Tx1 | Rx1 | RIO | RCK | RST | Gnd
User.26: FIGURE | FINISHED_SIZE | 24.0 | 31.5 | 35.0 | 40.0 | 45.0 | 50.0 | 55.0 | 80.0 | 120.0 | 140.0 | DRILL CHART: TOP to BOTTOM | ALL UNITS ARE IN MILS | TOLERANCE_DRILL | +0.0/-0.0 | +3.0/-3.0 | PLATED | QTY | 131 | 2 | 1 | 4 | 20 | 10 | 9 | 12 | 17
